# Altium PCB OMAPL-Extrention Prototype.PcbDoc
Units mm, origin at the board's own origin, x right, y up, seen from the top; angles counter-clockwise.
Board outline 125.6 x 88.65 mm, 2 copper layers (Top Layer, Bottom Layer); 39 components, 34 nets, 115 pads, 0 vias.
Unrouted connection lines stored in the file: 7.
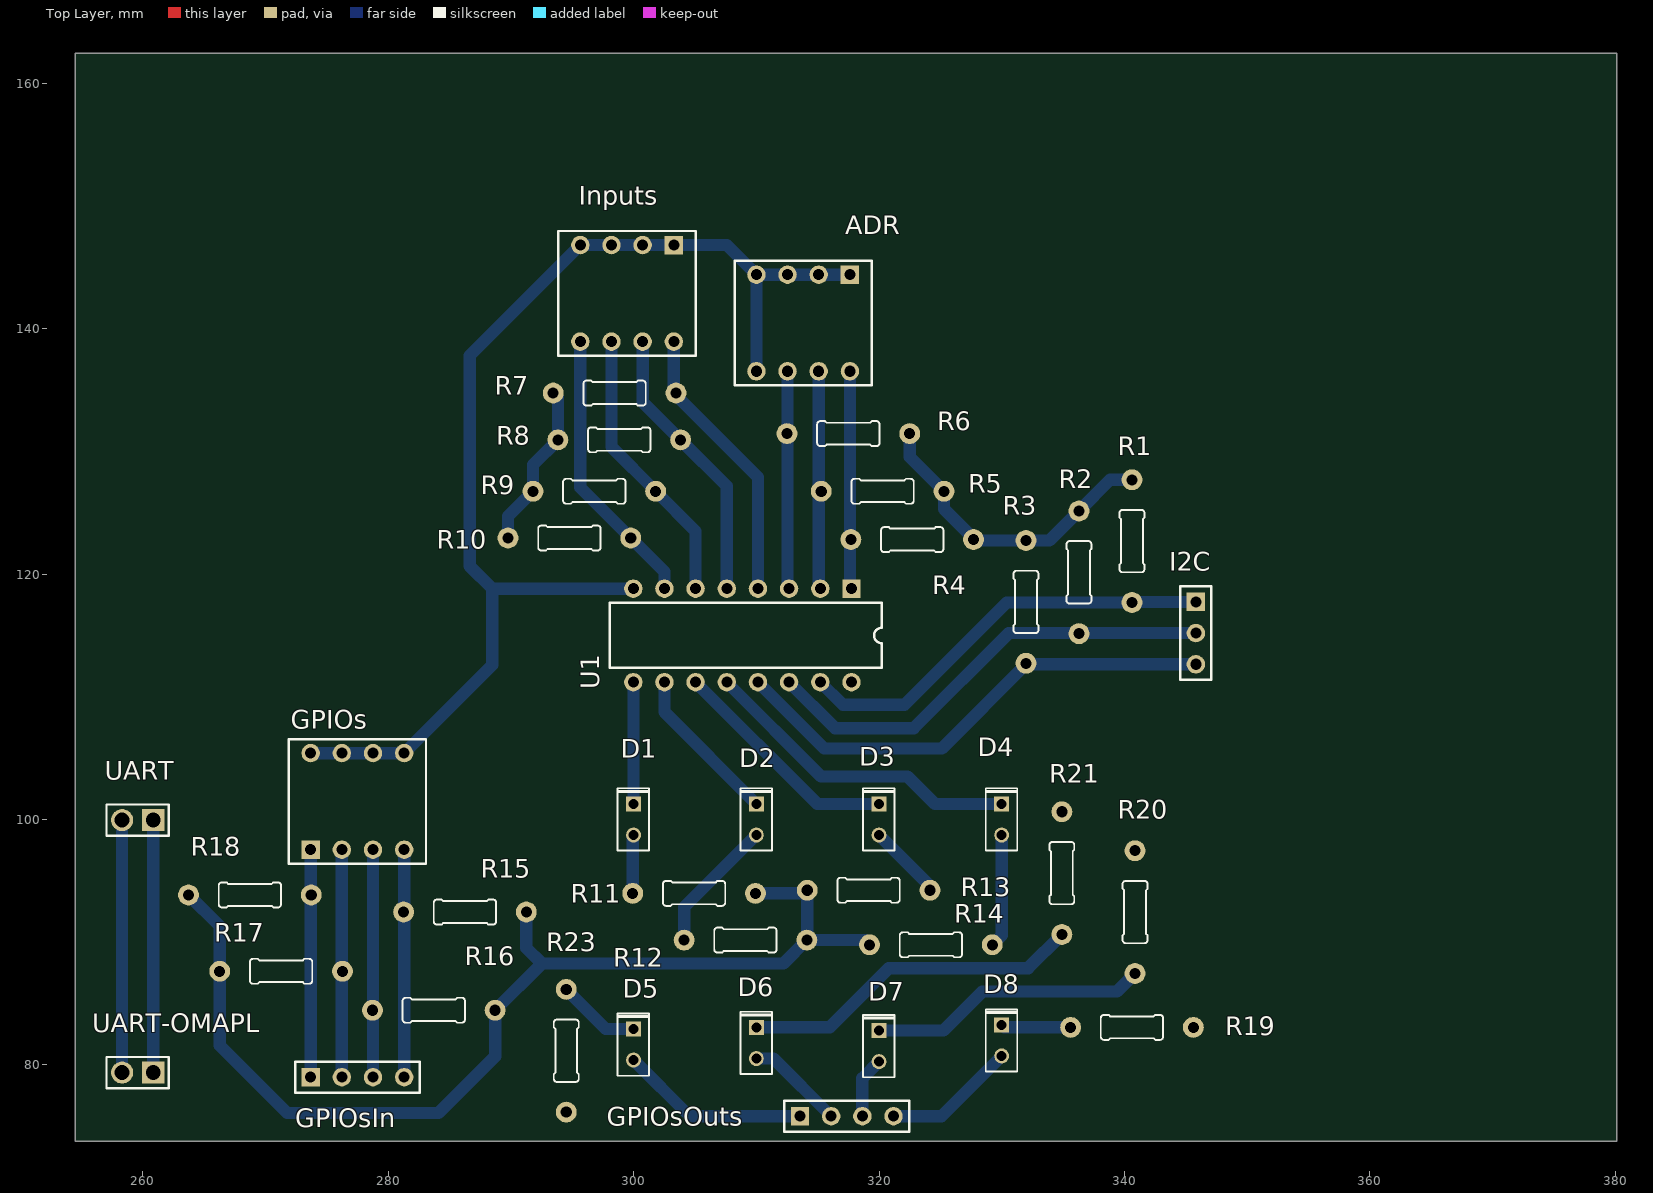
[diagram p0: Top Layer view]
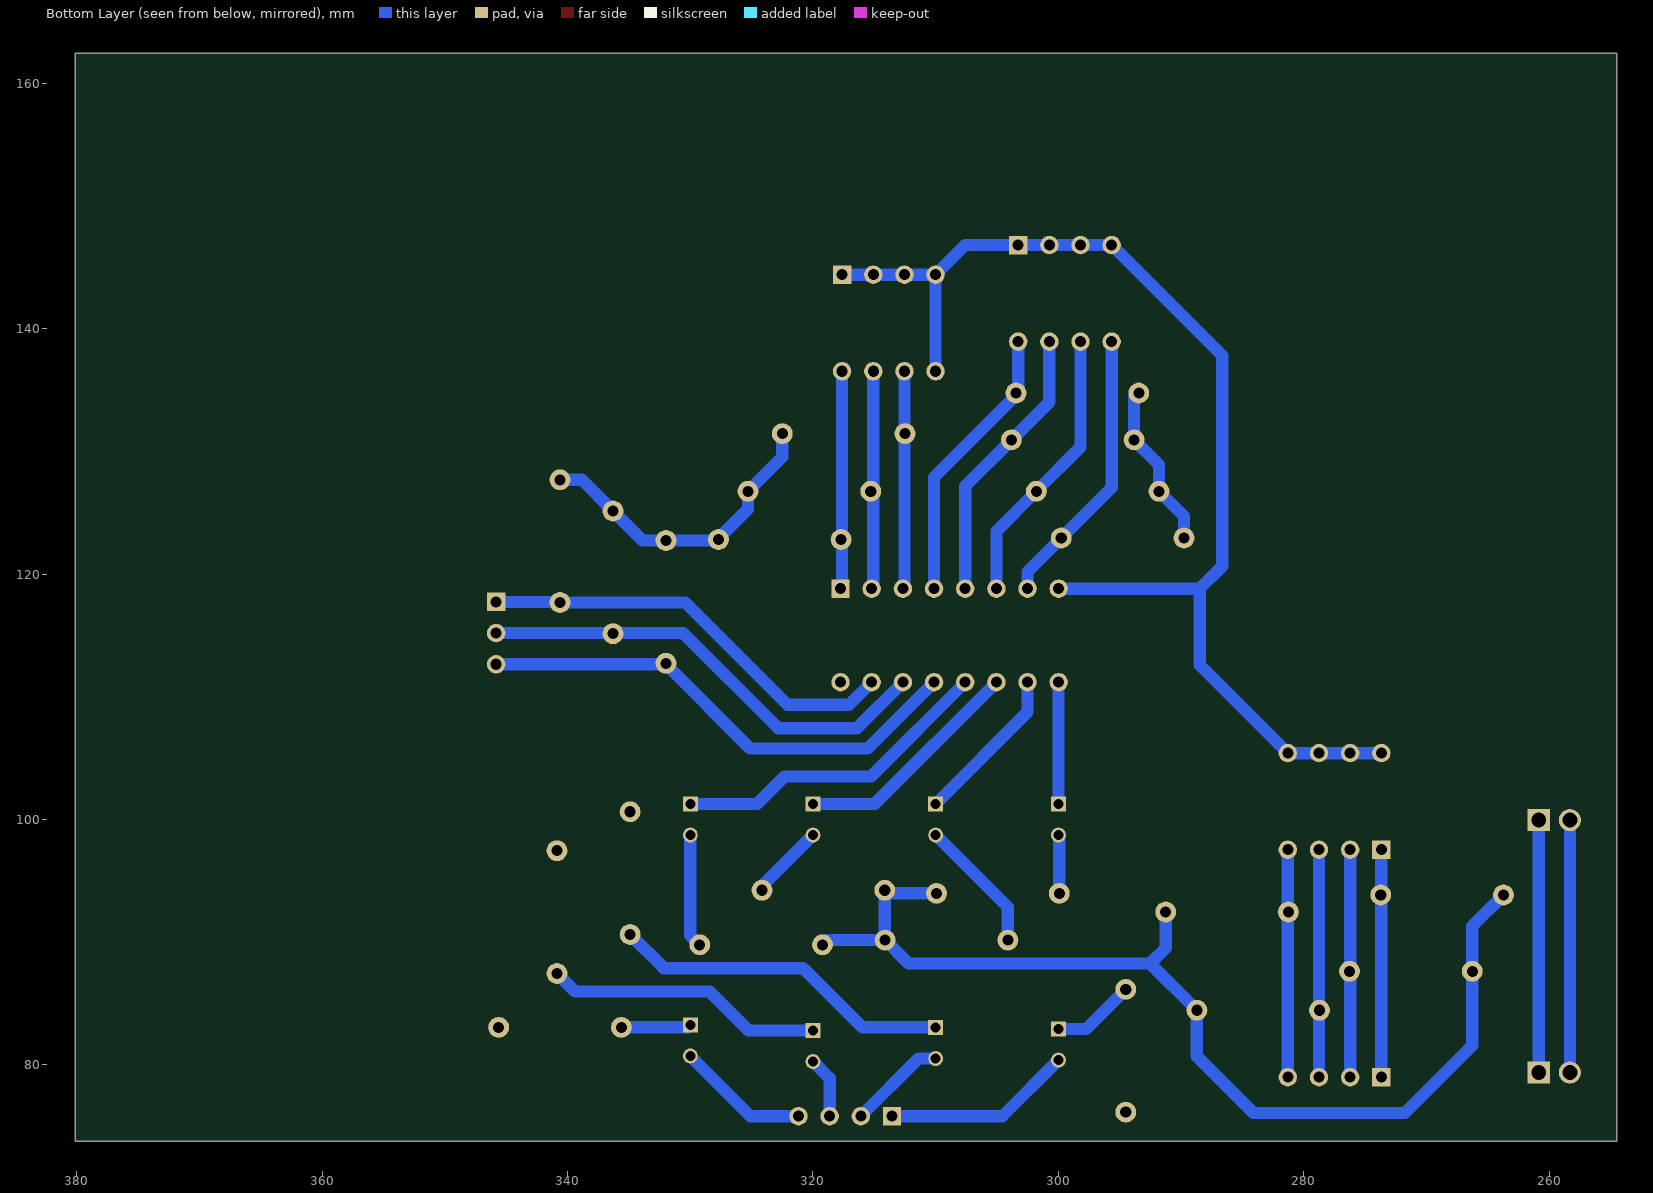
[diagram p1: Bottom Layer view, seen from below]

## Layer stack, top to bottom
Top Solder: solder mask 0.0102, Solder Resist, Dk 3.5
Top Layer: signal copper 0.0356
Dielectric 1: dielectric 0.32, FR-4, Dk 4.8
Bottom Layer: signal copper 0.0356
Bottom Solder: solder mask 0.0102, Solder Resist, Dk 3.5

## Board outline
254.508,73.787 254.508,162.433 380.111,162.433 380.111,73.787

## Design rules (kind name [scope] priority, off if disabled: settings)
Clearance Polygons [InPolygon] p1: gap=0.254
Clearance [All] p2: gap=0.15
MinimumSolderMaskSliver [All] p1: minsoldermaskwidth=0.1
PolygonConnect [All] p1: connectstyle=Relief reliefconductorwidth=0.254 reliefentries=4 polygonreliefangle="90 Angle" airgapwidth=0.254
RoomDefinition "OMAPL-Extrention Prototype" [InComponentClass('OMAPL-Extrention Prototype')] p1: confinementstyle=ConfineIn formatcopy=TRUE lockcomponents=FALSE outline 247.697,58.674 444.42,58.674 444.42,197.819 247.697,197.819
RoutingVias [All] p1: holewidth=0.711 width=1.27 viastyle="Through Hole" minholewidth=0 minwidth=0 maxholewidth=0.711 maxwidth=1.27
SilkToSilkClearance [All] p1: silktosilkclearance=0
SilkToSolderMaskClearance [IsPad] p1: minsilkscreentomaskgap=0.1 clearancetoexposedcopper=TRUE
SolderMaskExpansion [All] p1: expansion=0.102
Width [All] p1: maxlimit=4 minlimit=0.254 preferedwidth=0.5
27 further rules are at their usual default settings.

## Components (designator, comment, footprint, x,y, rotation, side; value= is the part's Value field where it differs from the comment)
ADR "WS-DITV-4DIP" DIP-8-Ceramic-HT 313.817,140.462 r180 top
D1 "151051RS11000" LED2X5 300,100 r90 top
D2 "151051RS11000" LED2X5 310,100 r90 top
D3 "151051RS11000" LED2X5 320,100 r90 top
D4 "151051RS11000" LED2X5 330,100 r90 top
D5 "151051RS11000" LED2X5 300,81.661 r90 top
D6 "151051RS11000" LED2X5 310,81.788 r90 top
D7 "151051RS11000" LED2X5 320,81.534 r90 top
D8 "151051RS11000" LED2X5 330,82 r90 top
GPIOs "WS-DITV-4DIP" DIP-8-Ceramic-HT 277.495,101.473 r0 top
GPIOsIn "Plug_4_90_2.54" HDR1X4 277.495,79 r0 top
GPIOsOuts "Plug_4_90_2.54" HDR1X4 317.373,75.819 r0 top
I2C "Plug_3_90_2.54" HDR1X3 345.821,115.189 r270 top
Inputs "WS-DITV-4DIP" DIP-8-Ceramic-HT 299.466,142.875 r180 top
R1 "Resistor-Dummy-THT" Dummy-10mm 340.614,122.682 r90 top
R2 "Resistor-Dummy-THT" Dummy-10mm 336.296,120.142 r90 top
R3 "Resistor-Dummy-THT" Dummy-10mm 331.978,117.729 r90 top
R4 "Resistor-Dummy-THT" Dummy-10mm 322.707,122.809 r0 top
R5 "Resistor-Dummy-THT" Dummy-10mm 320.294,126.746 r0 top
R6 "Resistor-Dummy-THT" Dummy-10mm 317.5,131.445 r0 top
R7 "Resistor-Dummy-THT" Dummy-10mm 298.45,134.747 r180 top
R8 "Resistor-Dummy-THT" Dummy-10mm 298.831,130.937 r180 top
R9 "Resistor-Dummy-THT" Dummy-10mm 296.799,126.746 r180 top
R10 "Resistor-Dummy-THT" Dummy-10mm 294.767,122.936 r180 top
R11 "Resistor-Dummy-THT" Dummy-10mm 304.927,93.98 r180 top
R12 "Resistor-Dummy-THT" Dummy-10mm 309.118,90.17 r180 top
R13 "Resistor-Dummy-THT" Dummy-10mm 319.151,94.234 r0 top
R14 "Resistor-Dummy-THT" Dummy-10mm 324.231,89.789 r0 top
R15 "Resistor-Dummy-THT" Dummy-10mm 286.258,92.456 r0 top
R16 "Resistor-Dummy-THT" Dummy-10mm 283.718,84.455 r0 top
R17 "Resistor-Dummy-THT" Dummy-10mm 271.272,87.63 r180 top
R18 "Resistor-Dummy-THT" Dummy-10mm 268.732,93.853 r180 top
R19 "Resistor-Dummy-THT" Dummy-10mm 340.614,83.058 r180 top
R20 "Resistor-Dummy-THT" Dummy-10mm 340.868,92.456 r270 top
R21 "Resistor-Dummy-THT" Dummy-10mm 334.899,95.631 r270 top
R23 "Resistor-Dummy-THT" Dummy-10mm 294.513,81.153 r90 top
U1 "PCF8574N" DIP-16 308.864,115 r180 top
UART "Plug_2_90_2.54" HDR1X2 259.588,99.949 r180 top
UART-OMAPL "Plug_2_90_2.54" HDR1X2 259.588,79.375 r180 top

## Footprints (in the part's own frame and the unit in brackets; to place one, negate y for a bottom-side part, rotate by r counter-clockwise, add the part's x,y. Pads: shape width x height; smd on the part's side, far side on the other; paste and mask are expansions set on the pad)
DIP-8-Ceramic-HT [mm] "DIP; 8 Leads; Row Spacing 7.62 mm; Pitch 2.54 mm"
  rect 1.5x1.5 hole 0.9: 1(-3.81,-3.935)
  round 1.5 hole 0.9: 2(-1.27,-3.935) 3(1.27,-3.935) 4(3.81,-3.935) 5(3.81,3.935) 6(1.27,3.935) 7(-1.27,3.935) 8(-3.81,3.935)
  silkscreen extent -5.59,-5.08 5.59,5.08, body extent -5.55,-3.98 5.55,3.89, height 4.65
DIP-16 [mm] "DIP; 16 Leads; Row Spacing 7.62 mm; Pitch 2.54 mm"
  rect 1.5x1.5 hole 0.9: 1(-8.89,-3.81)
  round 1.5 hole 0.9: 2(-6.35,-3.81) 3(-3.81,-3.81) 4(-1.27,-3.81) 5(1.27,-3.81) 6(3.81,-3.81) 7(6.35,-3.81) 8(8.89,-3.81) 9(8.89,3.81) 10(6.35,3.81) 11(3.81,3.81) 12(1.27,3.81) 13(-1.27,3.81) 14(-3.81,3.81) 15(-6.35,3.81) 16(-8.89,3.81)
  silkscreen extent -11.37,-2.65 10.8,2.65, body extent -11.29,-2.6 10.8,2.7, height 3
Dummy-10mm [mm] "Dummy-10mm"
  round 1.7 hole 0.9: 1(-5,0) 2(5,0)
  silkscreen extent -2.54,-1.02 2.54,1.02, body extent -2.39,-0.88 2.41,0.88, height 1.87
HDR1X2 [mm] "Connector; Header; 2 Position"
  rect 1.8x1.8 hole 1.2: 1(-1.27,0)
  round 1.8 hole 1.2: 2(1.27,0)
  silkscreen extent -2.54,-1.27 2.54,1.27, body extent -2.54,-1.27 2.54,1.27, height 8.62
HDR1X3 [mm] "Connector; Header; 3 Position"
  rect 1.5x1.5 hole 0.9: 1(-2.54,0)
  round 1.5 hole 0.9: 2(0,0) 3(2.54,0)
  silkscreen extent -3.81,-1.27 3.81,1.27, body extent -3.81,-1.27 3.81,1.27, height 8.62
HDR1X4 [mm] "Connector; Header; 4 Position"
  rect 1.5x1.5 hole 0.9: 1(-3.81,0)
  round 1.5 hole 0.9: 2(-1.27,0) 3(1.27,0) 4(3.81,0)
  silkscreen extent -5.08,-1.27 5.09,1.27, body extent -5.08,-1.31 5.08,1.27, height 8.62
LED2X5 [mil] "LED2X5"
  round 48 hole 32: A(-50,0)
  rect 48x48 hole 32: K(50,0)
  silkscreen extent -100,-50 100,51, body extent -114,-114 98,118, height 421

## Part data
ADR GPIOs Inputs: "4 way DIP switch"
D1 D2 D3 D4 D5 D6 D7 D8: "LED, 5mm, red, THT"
GPIOsIn GPIOsOuts: "Plug, 4-Pin"
I2C: "Plug,-3-Pin"
U1: "I2C 8-bit expander"
UART UART-OMAPL: "Plug, 2-Pin"

## Nets (pads, with @x,y where several pads share a name; then routed paths per layer and width w, separated by ;. In a path a pad name is that pad's centre, name@x,y a point inside that pad or via, vN(x,y) a via of type N, cw(c..) or ccw(c..) an arc to the next point about the centre after c; other vN are vias at no path point)
A0: ADR.8 R4.1 U1.1 | length 17.8
  Bottom Layer w1: ADR.8 317.627,118.937 U1.1
A1: ADR.7 R5.1 U1.2 | length 17.8
  Bottom Layer w1: ADR.7 315.087,118.937 U1.2
A2: ADR.6 R6.1 U1.3 | length 17.6
  Bottom Layer w1: U1.3@312.547,118.937 ADR.6
D1: D1.K U1.9 | length 9.9
  Bottom Layer w1: D1.K U1.9@300,111.164
D2: D2.K U1.10 | length 13
  Bottom Layer w1: U1.10 302.514,108.756 D2.K
D3: D3.K U1.11 | length 19.1
  Bottom Layer w1: U1.11 314.974,101.27 D3.K
D4: D4.K U1.12 | length 26.5
  Bottom Layer w1: U1.12 315.279,103.505 322.326,103.505 324.561,101.27 D4.K
EXP2_UART1_RXD: UART-OMAPL.1 UART.1 | length 20.6
  Bottom Layer w1: UART-OMAPL.1 UART.1
EXP2_UART1_TXD: UART-OMAPL.2 UART.2 | length 20.6
  Bottom Layer w1: UART-OMAPL.2 UART.2
EXP_EMIFA_D8: GPIOs.1 GPIOsIn.1 R18.1 | length 18.5
  Bottom Layer w1: GPIOsIn.1 GPIOs.1
EXP_EMIFA_D9: GPIOs.2 GPIOsIn.2 R17.1 | length 18.5
  Bottom Layer w1: GPIOsIn.2 GPIOs.2
EXP_EMIFA_D10: GPIOs.3 GPIOsIn.3 R16.1 | length 18.5
  Bottom Layer w1: GPIOsIn.3 GPIOs.3
EXP_EMIFA_D11: GPIOs.4 GPIOsIn.4 R15.1 | length 18.5
  Bottom Layer w1: GPIOsIn.4 GPIOs.4
EXP_EMIFA_D12: D5.A GPIOsOuts.1 | length 15.5
  Bottom Layer w1: D5.A 304.572,75.819 GPIOsOuts.1
EXP_EMIFA_D13: D6.A GPIOsOuts.2 | length 8
  Bottom Layer w1: D6.A 311.404,80.518 GPIOsOuts.2
EXP_EMIFA_D14: D7.A GPIOsOuts.3 | length 5
  Bottom Layer w1: GPIOsOuts.3 318.643,78.907 D7.A
EXP_EMIFA_D15: D8.A GPIOsOuts.4 | length 10.9
  Bottom Layer w1: GPIOsOuts.4 325.089,75.819 D8.A
GND: ADR.1 ADR.2 ADR.3 ADR.4 ADR.5 GPIOs.5 GPIOs.6 GPIOs.7 GPIOs.8 Inputs.1 Inputs.2 Inputs.3 Inputs.4 R19.1 R20.1 R21.1 R23.1 U1.8 | length 98.8
  Bottom Layer w1: GPIOs.8 GPIOs.7 GPIOs.6 GPIOs.5 288.479,112.582 288.479,118.81 ; U1.8 288.479,118.81 ; ADR.5 ADR.4 ; ADR.1 ADR.2 ADR.3 ADR.4 ; 288.479,118.81 286.639,120.65 286.639,137.793 Inputs.4 Inputs.3 Inputs.2 Inputs.1 307.594,146.81 ADR.4
IN1: Inputs.8 R7.1 U1.4 | length 23
  Bottom Layer w1: Inputs.8 303.276,134.747 310.134,127.889 U1.4
IN2: Inputs.7 R8.1 U1.5 | length 23
  Bottom Layer w1: Inputs.7 300.736,134.032 R8.1 307.594,127.174 U1.5
IN3: Inputs.6 R9.1 U1.6 | length 23
  Bottom Layer w1: Inputs.6 298.196,130.349 R9.1 305.054,123.491 U1.6
NetD1_A: D1.A R11.2 | length 4.7
  Bottom Layer w1: R11.2 D1.A@299.927,98.657
NetD2_A: D2.A R12.2 | length 11
  Bottom Layer w1: R12.2 304.118,92.848 D2.A
NetD3_A: D3.A R13.2 | length 6.2
  Bottom Layer w1: D3.A 324.151,94.579 R13.2
NetD4_A: D4.A R14.2 | length 9.3
  Bottom Layer w1: R14.2 330,90.558 D4.A
NetD5_K: D5.K R23.2 | length 6.8
  Bottom Layer w1: R23.2 297.735,82.931 D5.K
NetD6_K: D6.K R21.2 | length 28
  Bottom Layer w1: D6.K 315.976,83.058 320.802,87.884 332.152,87.884 R21.2
NetD7_K: D7.K R20.2 | length 22.8
  Bottom Layer w1: D7.K 325.247,82.804 328.422,85.979 339.391,85.979 R20.2
NetD8_K: D8.K R19.2 | length 5.7
  Bottom Layer w1: D8.K 330.212,83.058 R19.2
NetI2C_1: I2C.1 R1.1 U1.15 | length 34.8
  Bottom Layer w1: U1.15 317.057,109.347 322.072,109.347 330.407,117.682 R1.1 340.661,117.729 I2C.1
NetI2C_2: I2C.2 R2.1 U1.14 | length 37.9
  Bottom Layer w1: U1.14 316.422,107.442 322.834,107.442 330.581,115.189 I2C.2
NetI2C_3: I2C.3 R3.1 U1.13 | length 40.8
  Bottom Layer w1: U1.13 315.533,105.791 325.12,105.791 331.978,112.649 I2C.3
NetInputs_5: Inputs.5 R10.1 U1.7 | length 23
  Bottom Layer w1: Inputs.5 295.656,127.047 R10.1 302.514,120.189 U1.7
VCC: R1.2 R2.2 R3.2 R4.2 R5.2 R6.2 R7.2 R8.2 R9.2 R10.2 R11.1 R12.1 R13.1 R14.1 R15.2 R16.2 R17.2 R18.2 U1.16 | length 129.3
  Bottom Layer w1: R18.2 266.272,91.313 R17.2 266.272,81.581 271.78,76.073 284.099,76.073 288.718,80.692 R16.2 292.528,88.265 ; R10.2 289.767,124.714 R9.2 291.799,128.905 R8.2 293.831,134.366 R7.2 ; R15.2 291.258,89.535 292.528,88.265 ; R11.1 313.897,93.98 R13.1 314.151,90.203 R12.1 ; R14.1 318.85,90.17 R12.1 ; R6.2 322.5,129.54 R5.2 325.294,125.302 327.867,122.729 R3.2 333.883,122.729 R2.2 338.836,127.682 R1.2 ; 292.528,88.265 312.213,88.265 R12.1

## Silkscreen, mask and mechanical layers (free items; w line width, h text height)
outline:
  the board outline again, w0.1